# Altium PCB routing_for_buck_reg_12v_6a.PcbDoc
Units mil, origin at the board's own origin, x right, y up, seen from the top; angles counter-clockwise.
Board outline not stored, 2 copper layers (Top Layer, Bottom Layer); 39 components, 0 nets, 112 pads, 66 vias.
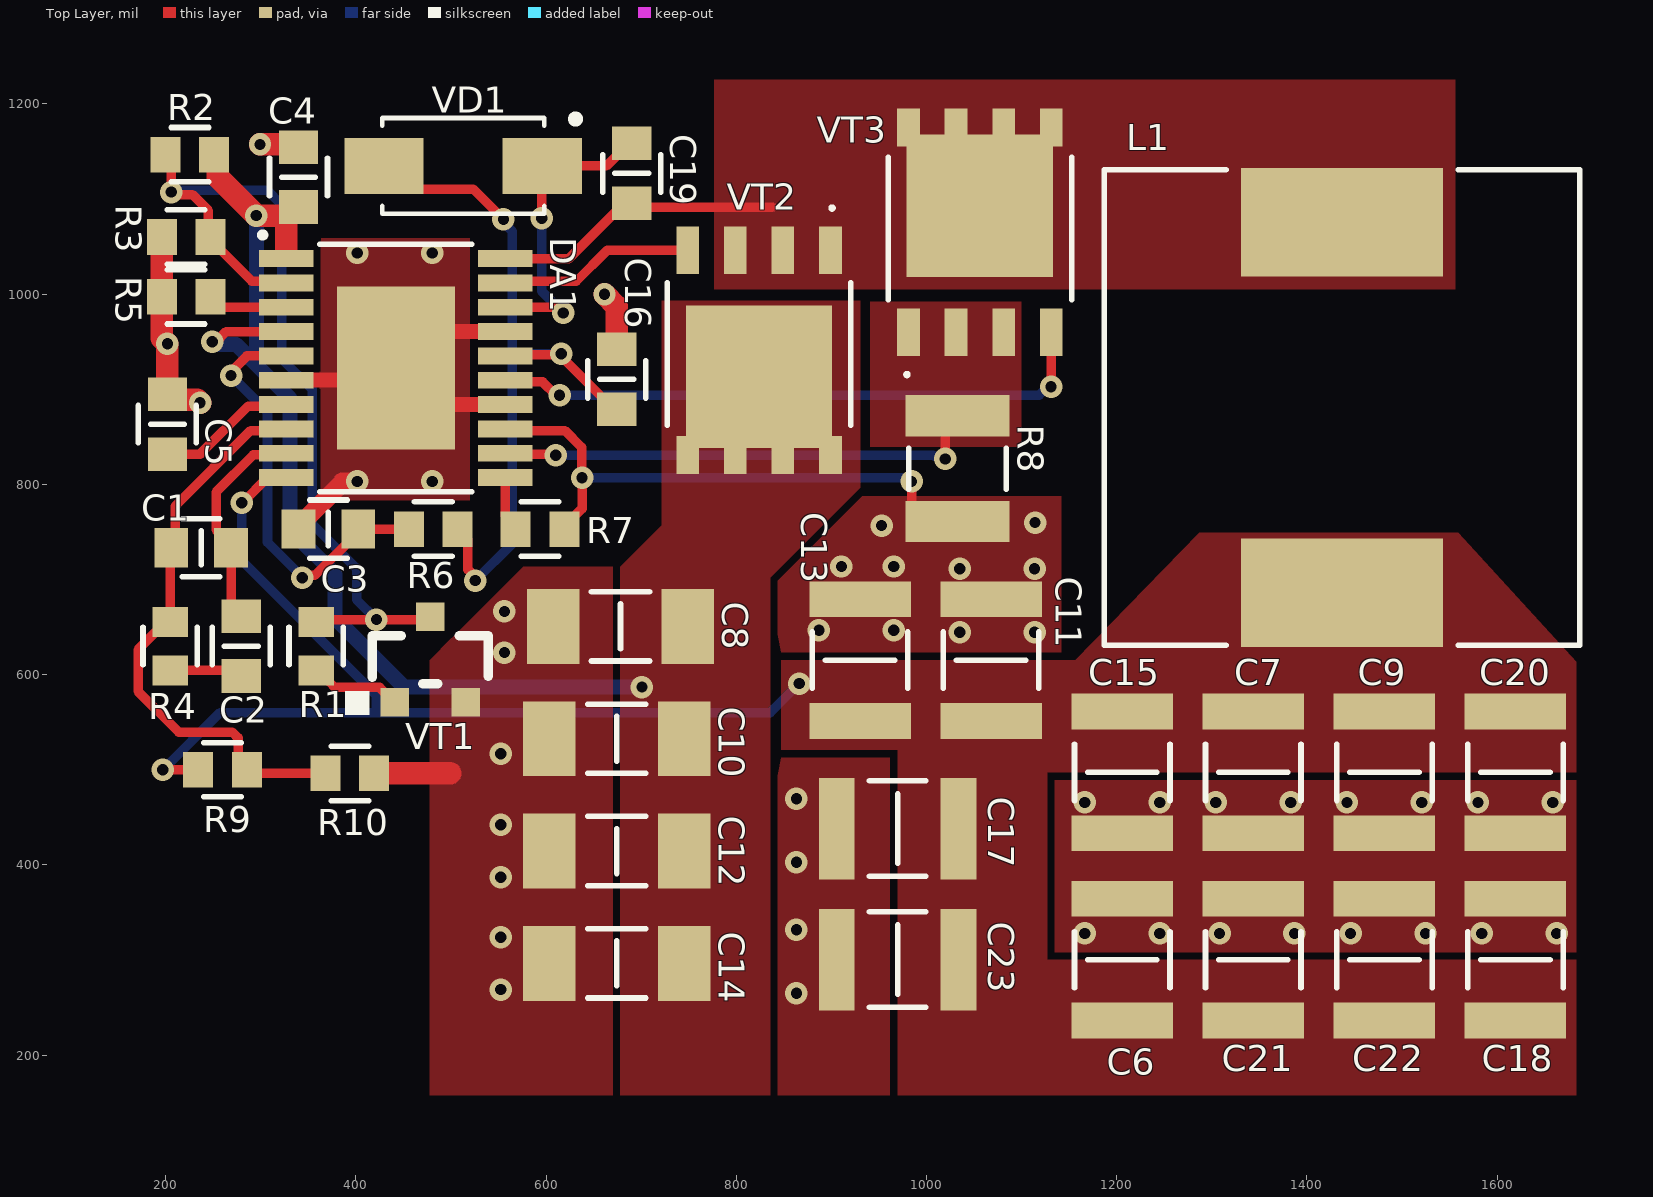
[diagram p0: Top Layer view]
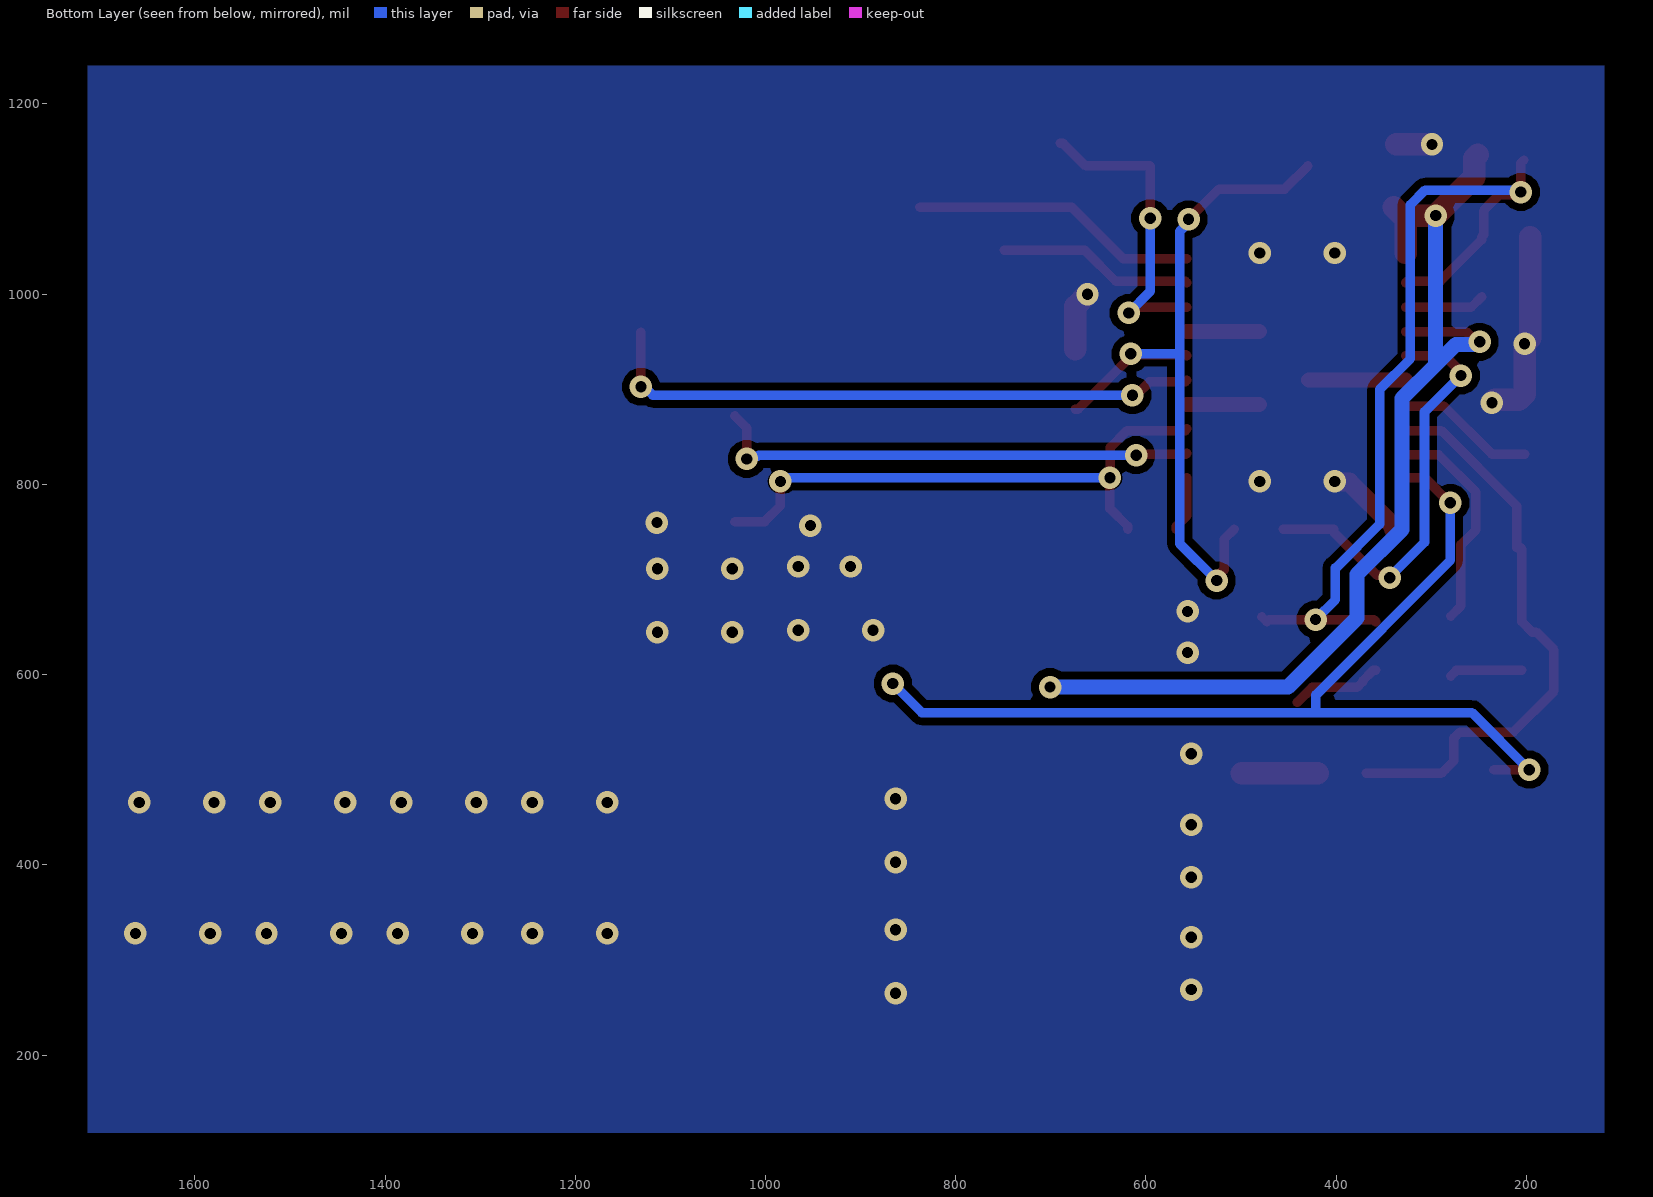
[diagram p1: Bottom Layer view, seen from below]

## Layer stack, top to bottom
Top Solder: solder mask 0.4, Solder Resist, Dk 3.5
Top Layer: signal copper 1.4
Dielectric 1: dielectric 12.6, FR-4, Dk 4.8
Bottom Layer: signal copper 1.4
Bottom Solder: solder mask 0.4, Solder Resist, Dk 3.5

## Components (designator, comment, footprint, x,y, rotation, side; value= is the part's Value field where it differs from the comment)
C1 "Capacitor" 0603C 237.28,733.35 r180 top value="0,01 н"
C2 "Capacitor" 0603C 279.53,629.92 r270 top value="0,15 н"
C3 "Capacitor" 0603C 371.14,753.03 r0 top value="0,75 н"
C4 "Capacitor" 0603C 339.65,1123.11 r270 top value="0,1 мк"
C5 "Capacitor" 0603C 201.85,863.27 r270 top value="10 н"
C6 "Capacitor" 1210C 1205.79,300.28 r270 top value="22 мк"
C7 "Capacitor" 1210C 1343.58,497.13 r90 top value="22 мк"
C8 "Capacitor" 1206C 678.23,650.67 r0 top value="2,2 мк"
C9 "Capacitor" 1210C 1481.38,497.13 r90 top value="22 мк"
C10 "Capacitor" 1206C 674.29,532.56 r0 top value="2,2 мк"
C11 "Capacitor" 1210C 1067.99,615.24 r270 top value="22 мк"
C12 "Capacitor" 1206C 674.29,414.45 r0 top value="2,2 мк"
C13 "Capacitor" 1210C 930.2,615.24 r270 top value="22 мк"
C14 "Capacitor" 1206C 674.29,296.34 r0 top value="2,2 мк"
C15 "Capacitor" 1210C 1205.79,497.13 r90 top value="22 мк"
C16 "Capacitor" 0603C 674.29,910.51 r90 top value="1 мк"
C17 "Capacitor" 1210C 969.57,438.07 r0 top value="22 мк"
C18 "Capacitor" 1210C 1619.17,300.28 r270 top value="22 мк"
C19 "Capacitor" 0603C 690.04,1127.05 r270 top value="1 мк"
C20 "Capacitor" 1210C 1619.17,497.13 r90 top value="22 мк"
C21 "Capacitor" 1210C 1343.58,300.28 r270 top value="22 мк"
C22 "Capacitor" 1210C 1481.38,300.28 r270 top value="22 мк"
C23 "Capacitor" 1210C 969.57,300.28 r0 top value="22 мк"
DA1 "LM5116MH" HTSSOP-20 442.01,922.32 r0 top
L1 "CDSPRH127-150M" SPRH127 1442.01,890.83 r270 top value="15 мк"
R1 "Resistor" 0603R 358.27,629.92 r90 top value=N/A
R2 "Resistor" 0603R 225.47,1146.73 r0 top value="33 к"
R3 "Resistor" 0603R 221.54,1060.12 r0 top value="2,7 к"
R4 "Resistor" 0603R 204.72,629.92 r90 top value="180 к"
R5 "Resistor" 0603R 221.54,997.13 r0 top value="12,4 к"
R6 "Resistor" 0603R 481.38,753.03 r180 top value="470 к"
R7 "Resistor" 0603R 593.58,753.03 r0 top value="10 к"
R8 "Resistor" 1210R 1032.56,816.54 r90 top value="10 м"
R9 "Resistor" 0603R 259.84,500 r180 top value="10,7 к"
R10 "Resistor" 0603R 393.7,496.06 r180 top value="1,21 к"
VD1 "ES1D-E3/61T" SMA 512.87,1134.92 r180 top
VT1 "PDTC114ET" SOT23-3 440.75,570.87 r90 top
VT2 "SIR426DP-T1-GE3" PowerPAK_SO-8 823.9,945.95 r270 top
VT3 "SIR426DP-T1-GE3" PowerPAK_SO-8 1056.18,1060.12 r90 top

## Footprints (in the part's own frame and the unit in brackets; to place one, negate y for a bottom-side part, rotate by r counter-clockwise, add the part's x,y. Pads: shape width x height; smd on the part's side, far side on the other; paste and mask are expansions set on the pad)
0603C [mm] "Chip Resistor, 2-Leads, Body 1,40x0,80mm, IPC Medium Density"
  rect 0.9x1.05 smd: 1(-0.8,0) 2(0.8,0)
  silkscreen extent -0.5,-0.77 0.5,0.77, body extent -0.85,-0.45 0.85,0.45, height 0.9
0603R [mm] "Chip Resistor, 2-Leads, Body 1.60x0.85mm, IPC Medium Density"
  rect 0.8x0.95 smd: 1(-0.65,0) 2(0.65,0)
  silkscreen extent -0.5,-0.72 0.5,0.72, body extent -0.87,-0.47 0.88,0.48, height 0.9
1206C [mm]
  rect 1.4x2 smd paste+0: 1(-1.8,0) 2(1.8,0)
  silkscreen extent -0.77,-0.92 0.77,0.92, body extent -1.6,-0.74 1.6,0.86, height 1.59
1210C [mm]
  rect 0.954x2.706 smd paste+0: 1(-1.625,0) 2(1.625,0)
  silkscreen extent -0.75,-1.28 0.75,1.28, body extent -2.35,-1.6 2.35,1.6, height 0.25
1210R [mm]
  rect 1.1x2.77 smd: 1(-1.413,0) 2(1.413,0)
  silkscreen extent -0.55,-1.3 0.55,1.3, body extent -1.55,-1.3 1.55,1.3, height 0.65
HTSSOP-20 [mm]
  rect 1.45x0.45 smd mask+0.051: 1(-2.925,2.925) 2(-2.925,2.275) 3(-2.925,1.625) 4(-2.925,0.975) 5(-2.925,0.325) 6(-2.925,-0.325) 7(-2.925,-0.975) 8(-2.925,-1.625) 9(-2.925,-2.275) 10(-2.925,-2.925) 11(2.925,-2.925) 12(2.925,-2.275) 13(2.925,-1.625) 14(2.925,-0.975) 15(2.925,-0.325) 16(2.925,0.325) 17(2.925,0.975) 18(2.925,1.625) 19(2.925,2.275) 20(2.925,2.925)
  rect 3.15x4.35 smd: 21(0,0)
  silkscreen extent -3.61,-3.3 2.03,3.61, body extent -3.21,-3.25 3.21,3.25, height 1
PowerPAK_SO-8 [mm]
  rect 1.27x0.61 smd: 1(-2.543,1.905) 2(-2.543,0.635) 3(-2.543,-0.635) 4(-2.543,-1.905)
  rect 1.02x0.61 smd: 5(2.921,-1.905) 8(2.921,1.905)
  rect 0.71x0.61 smd: 6(3.077,-0.635) 7(3.077,0.635)
  rect 3.81x3.91 smd: 9(0.83,0)
  silkscreen extent -3.72,-2.45 2.13,2.45, body extent -2.95,-2.58 3.2,2.58, height 1.12
SMA [mm]
  rect 2.12x1.5 smd: 1(2.115,0) 2(-2.115,0)
  silkscreen extent -3.1,-1.35 2.16,1.28, body extent -2.57,-1.28 2.57,1.28, height 2.5
SOT23-3 [mil]
  rect 30x30 smd: 1(0,0) 2(0,-75) 3(90,-37.5)
  silkscreen extent -13,-98 70,52, body extent -4,-97 94,21, height 41
SPRH127 [mm]
  rect 2.9x5.4 smd: 1(-4.696,-0.127) 2(5.204,-0.127)
  silkscreen extent -6.1,-6.48 6.6,6.22, body extent -5.75,-6.13 6.25,5.87, height 8.05

## Part data
C1: library part Capacitor_0,01n_10_50V_X7R_0603C, "Конденсатор", Capacity (nF)=0,01, Dielectric=X7R, Tolerance=0,1, Voltage (V)=50, Library Path2=Schematic\Capacitor.SchLib, Part Number=Capacitor_0,01n_10_50V_X7R_0603C
C2: library part Capacitor_0,15n_10_50V_X7R_0603C, "Конденсатор", Capacity (nF)=0,15, Dielectric=X7R, Tolerance=0,1, Voltage (V)=50, Library Path2=Schematic\Capacitor.SchLib, Part Number=Capacitor_0,15n_10_50V_X7R_0603C
C3: library part Capacitor_0,75n_10_50V_X7R_0603C, "Конденсатор", Capacity (nF)=0,75, Dielectric=X7R, Tolerance=0,1, Voltage (V)=50, Library Path2=Schematic\Capacitor.SchLib, Part Number=Capacitor_0,75n_10_50V_X7R_0603C
C4: library part Capacitor_0,1u_10_50V_X7R_0603C, "Конденсатор", Capacity (nF)=100, Dielectric=X7R, Tolerance=0,1, Voltage (V)=50, Library Path2=Schematic\Capacitor.SchLib, Part Number=Capacitor_0,1u_10_50V_X7R_0603C
C5: library part Capacitor_10n_10_50V_X7R_0603C, "Конденсатор", Capacity (nF)=10, Dielectric=X7R, Tolerance=0,1, Voltage (V)=50, Library Path2=Schematic\Capacitor.SchLib, Part Number=Capacitor_10n_10_50V_X7R_0603C
C6 C7 C9 C11 C13 C15 C17 C18 C20 C21 C22 C23: library part Capacitor_22u_10_25V_X7R_1210C, "Конденсатор", Capacity (nF)=22000, Dielectric=X7R, Tolerance=0,1, Voltage (V)=25, Library Path2=Schematic\Capacitor.SchLib, Part Number=Capacitor_22u_10_25V_X7R_1210C
C8 C10 C12 C14: library part Capacitor_2,2u_10_50V_X7R_1206C, "Конденсатор", Capacity (nF)=2200, Dielectric=X7R, Tolerance=0,1, Voltage (V)=50, Library Path2=Schematic\Capacitor.SchLib, Part Number=Capacitor_2,2u_10_50V_X7R_1206C
C16 C19: library part Capacitor_1u_10_50V_X7R_0603C, "Конденсатор", Capacity (nF)=1000, Dielectric=X7R, Tolerance=0,1, Voltage (V)=50, Library Path2=Schematic\Capacitor.SchLib, Part Number=Capacitor_1u_10_50V_X7R_0603C
DA1: "dc-dc понижающий adj 6-100v", Manufacturer_Part_Number=LM5116MH/NOPB, Part Number=LM5116MH
L1: "Индуктивность на 15 мкГн, номинальный ток 8,4 А", Current (A)=8,4, Inductance (μH)=15, Part Number=CDSPRH127-150M
R1: library part res_0603_N/A, "посадочное место 0603 под перемычку", Tolerance=1%, Part Number=res_0603_N/A
R2: library part Resistor_33k_1_0603, "Резистор номиналом 33 кОм и точностью 1%", Tolerance=1%, Part Number=Resistor_33k_1_0603
R3: library part Resistor_2.7k_1_0603, "Резистор номиналом 2,7 кОм и точностью 1%", Tolerance=1%, Part Number=Resistor_2.7k_1_0603
R4: library part Resistor_180k_1_0603, "Резистор номиналом 180 кОм и точностью 1%", Tolerance=1%, Part Number=Resistor_180k_1_0603
R5: library part Resistor_12.4k_1_0603, "Резистор номиналом 12,4 кОм и точностью 1%", Tolerance=1%, Part Number=Resistor_12.4k_1_0603
R6: library part Resistor_470k_1_0603, "Резистор номиналом 470 кОм и точностью 1%", Tolerance=1%, Part Number=Resistor_470k_1_0603
R7: library part Resistor_10k_1_0603, "Резистор номиналом 10 кОм и точностью 1%", Tolerance=1%, Part Number=Resistor_10k_1_0603
R8: library part RL1210FR-070R01L, "Резистор номиналом 10 мОм, точностью 1%, 0.5Вт", Tolerance=1%, Part Number=RL1210FR-070R01L
R9: library part Resistor_10.7k_1_0603, "Резистор номиналом 10,7 кОм и точностью 1%", Tolerance=1%, Part Number=Resistor_10.7k_1_0603
R10: library part Resistor_1.21k_1_0603, "Резистор номиналом 1,21 кОм и точностью 1%", Tolerance=1%, Part Number=Resistor_1.21k_1_0603
VD1: "Диод 1A 200V", Current (A)=1, Repetitive peak reverse voltage (Vrrm)=200, Part Number=ES1D-E3/61T
VT1: "цифровой npn 50в 100мА", Part Number=PDTC114ET, Напряжение С-И/К-Э="50 В", Ток макс#="0, 1 А"
VT2 VT3: "Транзистор полевой MOSFET N-канальный 40В 41.7Вт", Part Number=SIR426DP-T1-GE3, Напряжение С-И/К-Э="40 В"

## Via types
v1: diameter 23.62, hole 11.81, Top Layer to Bottom Layer, tented both sides, 66 vias

## Nets (pads, with @x,y where several pads share a name; then routed paths per layer and width w, separated by ;. In a path a pad name is that pad's centre, name@x,y a point inside that pad or via, vN(x,y) a via of type N, cw(c..) or ccw(c..) an arc to the next point about the centre after c; other vN are vias at no path point)
pads on no net: C1.1 C1.2 C2.1 C2.2 C3.1 C3.2 C4.1 C4.2 C5.1 C5.2 C6.1 C6.2 C7.1 C7.2 C8.1 C8.2 C9.1 C9.2 C10.1 C10.2 C11.1 C11.2 C12.1 C12.2 C13.1 C13.2 C14.1 C14.2 C15.1 C15.2 C16.1 C16.2 C17.1 C17.2 C18.1 C18.2 C19.1 C19.2 C20.1 C20.2 C21.1 C21.2 C22.1 C22.2 C23.1 C23.2 DA1.1 DA1.2 DA1.3 DA1.4 DA1.5 DA1.6 DA1.7 DA1.8 DA1.9 DA1.10 DA1.11 DA1.12 DA1.13 DA1.14 DA1.15 DA1.16 DA1.17 DA1.18 DA1.19 DA1.20 DA1.21 L1.1 L1.2 R1.1 R1.2 R2.1 R2.2 R3.1 R3.2 R4.1 R4.2 R5.1 R5.2 R6.1 R6.2 R7.1 R7.2 R8.1 R8.2 R9.1 R9.2 R10.1 R10.2 VD1.1 VD1.2 VT1.1 VT1.2 VT1.3 VT2.1 VT2.2 VT2.3 VT2.4 VT2.5 VT2.6 VT2.7 VT2.8 VT2.9 VT3.1 VT3.2 VT3.3 VT3.4 VT3.5 VT3.6 VT3.7 VT3.8 VT3.9
copper on no net: | length 9026.7
  Top Layer w10: v1(196.85,500) 234.25,500 ; 201.85,831.77 236.27,831.77 286.71,882.2 325.12,882.2 326.85,883.94 ; 202.83,1140.83 205.79,1137.87 v1(205.79,1107.36) 208.39,1104.76 228.08,1104.76 244.87,1087.96 244.87,1062.37 247.13,1060.12 247.13,1057.17 290.67,1013.62 325.12,1013.62 326.85,1011.89 ; 204.72,604.33 273.62,604.33 279.53,598.43 ; 205.79,733.35 204.72,732.28 204.72,655.51 193.98,644.76 189.5,644.76 171.02,626.29 171.02,582.37 214.02,539.37 270.22,539.37 276.08,533.51 276.08,509.35 285.43,500 289.37,496.06 368.11,496.06 ; 209.85,733.47 209.85,777.07 289.4,856.61 325.12,856.61 326.85,858.35 ; 247.13,997.13 247.13,997.05 257.87,986.3 326.85,986.3 ; v1(249.09,949.88) 252.78,949.88 263.61,960.71 326.85,960.71 ; v1(268.78,914.45) 271.39,917.06 271.39,920.99 285.51,935.12 326.85,935.12 ; 279.53,661.42 268.78,672.17 268.78,733.35 268.78,736.3 253.03,752.05 253.03,791.96 292.09,831.02 325.12,831.02 326.85,832.76 ; v1(279.96,780.59) 280.59,780.59 307.17,807.17 326.85,807.17 ; 336.77,1157.48 339.65,1154.61 ; v1(343.58,701.85) 346.19,704.46 357.02,704.46 402.64,750.08 402.64,753.03 455.79,753.03 ; 358.27,604.33 361.22,604.33 371.97,593.58 371.97,592.47 377.83,586.61 425,586.61 440.75,570.87 ; 358.27,655.51 360.64,657.88 v1(421.66,657.88) 422.06,657.48 470.93,657.48 472.89,655.51 478.25,660.87 ; 429.61,1134.92 454.13,1110.39 523.46,1110.39 v1(555.12,1078.74) ; 506.97,753.03 517.72,742.28 517.72,710.38 525.59,702.5 v1(525.59,698.82) ; 557.17,807.17 557.17,766.81 567.99,755.98 567.99,753.03 ; 557.17,832.76 558.19,831.73 609.21,831.73 v1(610.24,830.71) ; 557.17,858.35 558.9,856.61 619.76,856.61 637.48,838.9 637.48,807.4 v1(637.8,807.09) 637.8,774.61 619.17,755.98 619.17,753.03 ; 557.17,909.53 558.9,907.8 596.39,907.8 610.49,893.7 v1(614.17,893.7) ; 557.17,935.12 558.25,936.2 614.93,936.2 v1(616.02,937.29) ; 557.17,986.3 608.44,986.3 614.42,980.32 v1(618.11,980.32) ; 557.17,1011.89 558.9,1013.62 631.73,1013.62 664.17,1046.06 748.9,1046.06 ; 557.17,1037.48 624.09,1037.48 678.23,1091.61 837.71,1091.61 ; v1(595.55,1079.8) 595.55,1134.33 596.14,1134.92 663.46,1134.92 687.09,1158.54 690.04,1158.54 ; v1@618.68,934.63 619.17,934.13 619.17,931.18 671.34,879.02 674.29,879.02 ; v1(984.25,803.15) 984.25,777.56 1000.91,760.91 1032.56,760.91 ; v1(1019.68,826.77) 1019.68,859.29 1032.56,872.17 ; v1(1130.98,902.64) 1131.08,902.74 1131.08,959.9 1131.18,960
  Top Layer w15.75: 326.85,909.53 429.21,909.53 ; 480.39,883.94 557.17,883.94 ; 480.39,960.71 557.17,960.71
  Top Layer w19.68: 339.65,753.03 339.65,755.98 386.06,802.4 400.82,802.4 v1(401.57,803.15)
  Top Layer w23.62: 195.94,1060.12 195.94,997.13 195.94,953.66 v1(201.85,947.76) 201.85,894.76 207.76,888.86 233.19,888.86 v1(236.22,885.83) ; 251.06,1146.73 255,1142.8 255,1122.95 v1(295.28,1082.68) 330.71,1082.68 339.65,1091.61 ; v1(299.21,1157.48) 336.77,1157.48 ; 326.85,1043.31 326.85,1078.9 ; 419.29,496.06 499.01,496.06 ; v1(661.42,1000) 674.29,987.13 674.29,942.01
  Bottom Layer w10: v1(196.85,500) 197.18,500 257.3,560.12 421.26,560.12 ; v1(205.79,1107.36) 207.91,1109.49 306.38,1109.49 322.09,1093.78 322.09,932.01 354.33,899.76 354.33,758.03 399.76,712.6 ; v1(268.78,914.45) 307.09,876.14 307.09,739.2 343.58,702.71 v1(343.58,701.85) ; v1(279.96,780.59) 279.96,720.04 421.26,578.74 421.26,560.12 ; 400.83,712.6 400.83,678.71 v1(421.66,657.88) ; v1(525.59,698.82) 564.51,737.74 564.51,937.29 ; v1(555.12,1078.74) 555.12,1075.46 564.51,1066.07 564.51,937.29 ; v1(595.55,1079.8) 595.55,1002.87 v1(618.11,980.32) ; v1(610.24,830.71) 1007.02,830.71 1008.35,829.38 1017.08,829.38 v1(1019.68,826.77) ; v1(614.17,893.7) 1118.36,893.7 1127.3,902.64 v1(1130.98,902.64) ; v1(616.02,937.29) 564.51,937.29 ; v1(637.8,807.09) 976.63,807.09 980.57,803.15 v1(984.25,803.15) ; v1(866.14,590.55) 835.71,560.12 421.26,560.12
  Bottom Layer w15.75: v1(249.09,949.88) 251.7,947.28 273.87,947.28 295.28,925.87 ; v1(295.28,1082.68) 295.28,925.87 ; v1(700.79,586.93) 450.63,586.93 377.95,659.61 377.95,705.4 330.71,752.64 330.71,890.44 295.28,925.87
  other v1: 863.27,264.84 552.24,268.78 552.24,323.9 1166.42,327.83 1245.16,327.83 1308.15,327.83 1386.89,327.83 1445.94,327.83 1524.69,327.83 1583.74,327.83 1662.48,327.83 863.27,331.77 552.24,386.89 863.27,402.64 552.24,442.01 1166.42,465.63 1245.16,465.63 1304.21,465.63 1382.95,465.63 1442.01,465.63 1520.75,465.63 1579.8,465.63 1658.54,465.63 863.27,469.57 552.24,516.81 556.18,623.11 1034.88,644.41 1113.62,644.41 886.89,646.73 965.63,646.73 556.18,666.42 1034.88,711.34 1113.62,711.34 910.51,713.66 965.63,713.66 952.76,756.65 1114.17,759.84 480.31,803.15 401.57,1043.31 480.31,1043.31

## Polygon pours and split planes (outlines as drawn)
no net on Top Layer "GND_L01_P010" (solid, pour order 10): 1141.73,787.4 1141.73,615.24 1683.07,615.24 1683.07,157.48 477.44,157.48 477.44,615.24 575.87,713.66 772.72,713.66 772.72,787.4
no net on Top Layer "GND_L01_P011" (solid, pour order 11): 519.68,1059.06 519.68,783.46 362.2,783.46 362.2,1059.06
no net on Top Layer "VIN_L01_P009" (solid, pour order 9): 930.2,993.19 721.54,993.19 721.54,756.97 678.23,713.66 678.23,157.48 835.71,157.48 835.71,701.85 930.2,796.34
no net on Top Layer "VOUT_L01_P007" (solid, pour order 7): 1683.07,497.13 1127.05,497.13 1127.05,487.28 1127.05,300.28 1683.07,300.28 1683.07,157.48 969.57,157.48 969.57,520.75 847.52,520.75 847.52,615.24 1156.25,615.24 1286.76,749.09 1559.36,749.09 1683.07,613.41
no net on Top Layer "CS_L01_P006" (solid, pour order 6): 940.94,992.13 1099.49,992.13 1099.49,839.65 940.94,839.65
no net on Top Layer "SW_L01_P005" (solid, pour order 5): 1556.18,1005 1556.18,1225.47 776.65,1225.47 776.65,1005
no net on Bottom Layer "GND_L02_P003" (solid, pour order 3): 1712.6,1240.16 1712.6,118.11 118.11,118.11 118.11,1240.16

## Silkscreen, mask and mechanical layers (free items; w line width, h text height)
Mechanical 873:
  text "SW" at 1181.1,1044.56 h118.11
  text "CS" at 944.88,906.77 h118.11
  text "Vout" at 1299.21,631.18 h118.11
  text "Vin" at 807.09,393.7 h118.11 r90
  text "GND" at 1279.53,355.59 h118.11
  text "GND" at 196.85,257.16 h118.11
  text "после резмещения snippet вам требуется проконтролировать правила заливки полигонов и в ручную указать каждому полигону его net, соответствующие обозначения сделаны на слое M873" at 59.06,0 h60